# Altium PCB PowerDistributionBoard.PcbDoc
Units mil, origin at the board's own origin, x right, y up, seen from the top; angles counter-clockwise.
Board outline 5250 x 3800 mil, 2 copper layers (Top Layer, Bottom Layer); 39 components, 17 nets, 136 pads, 4 vias.
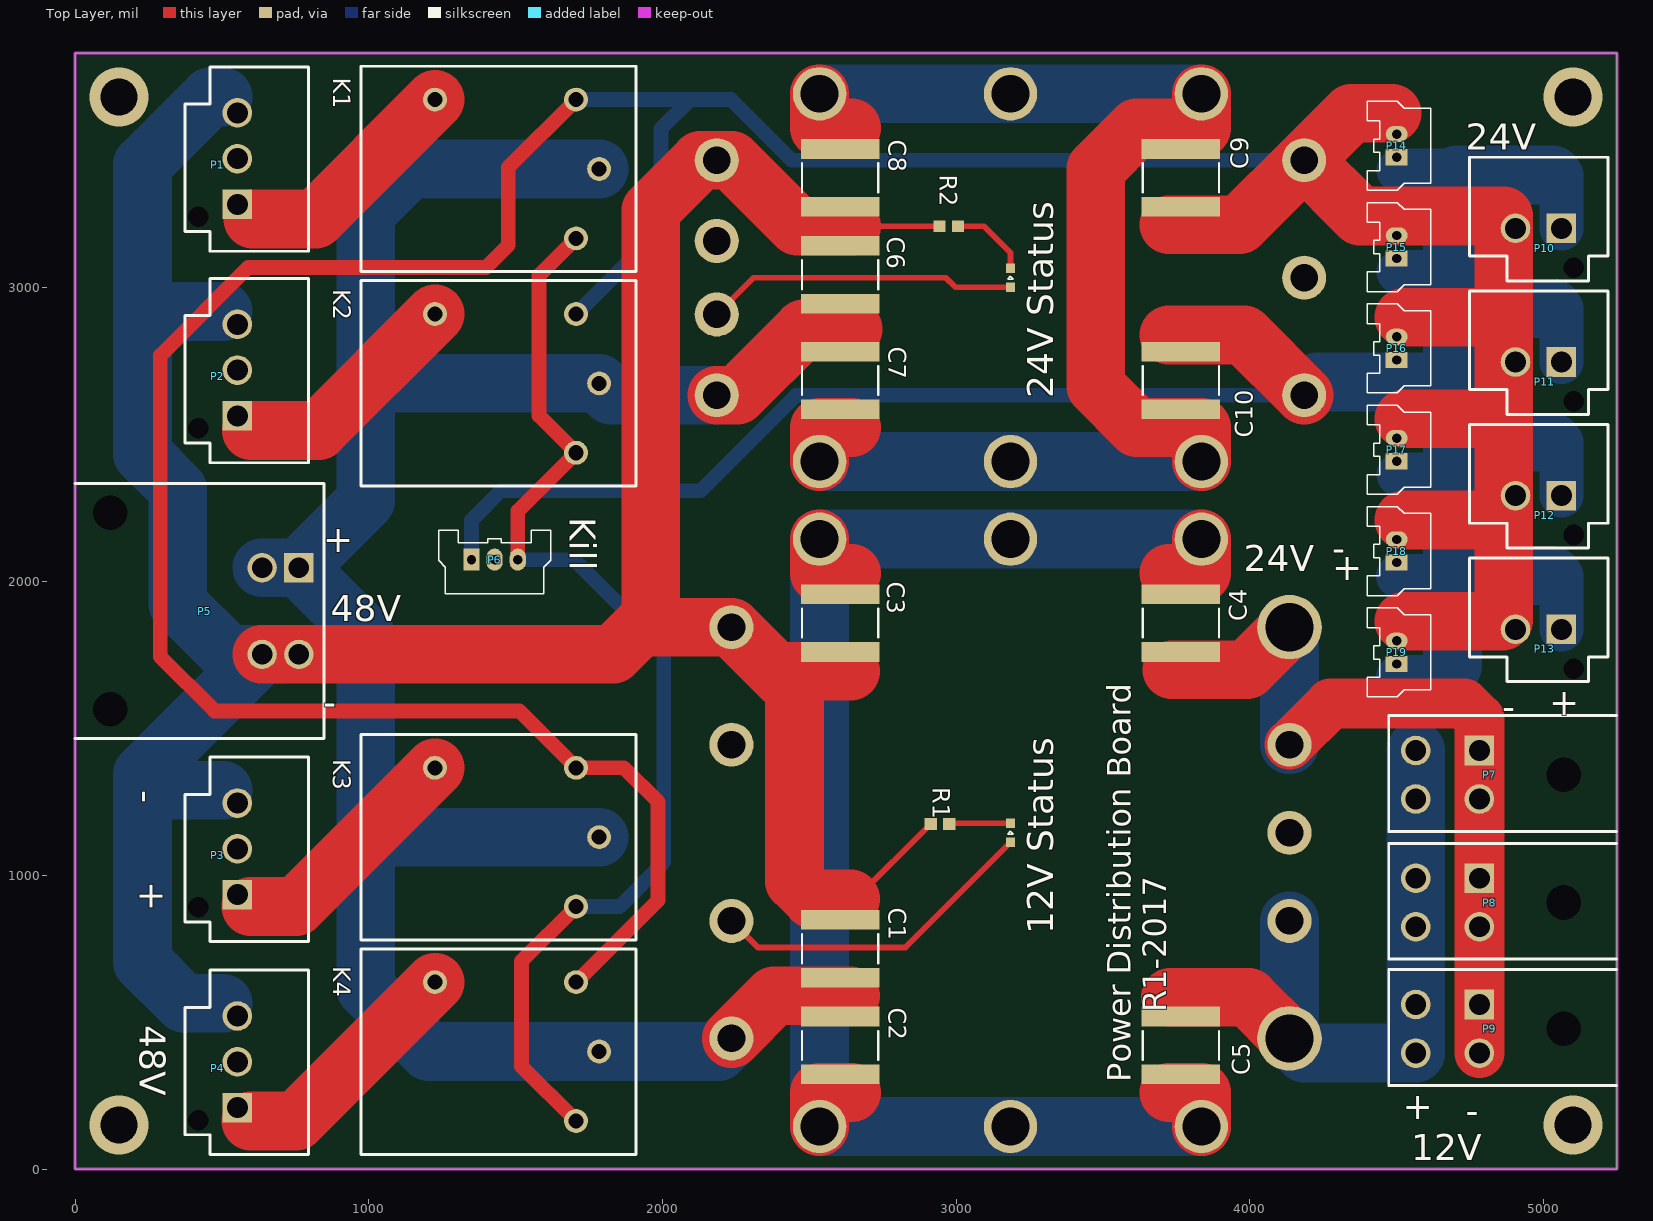
[diagram p0: Top Layer view]
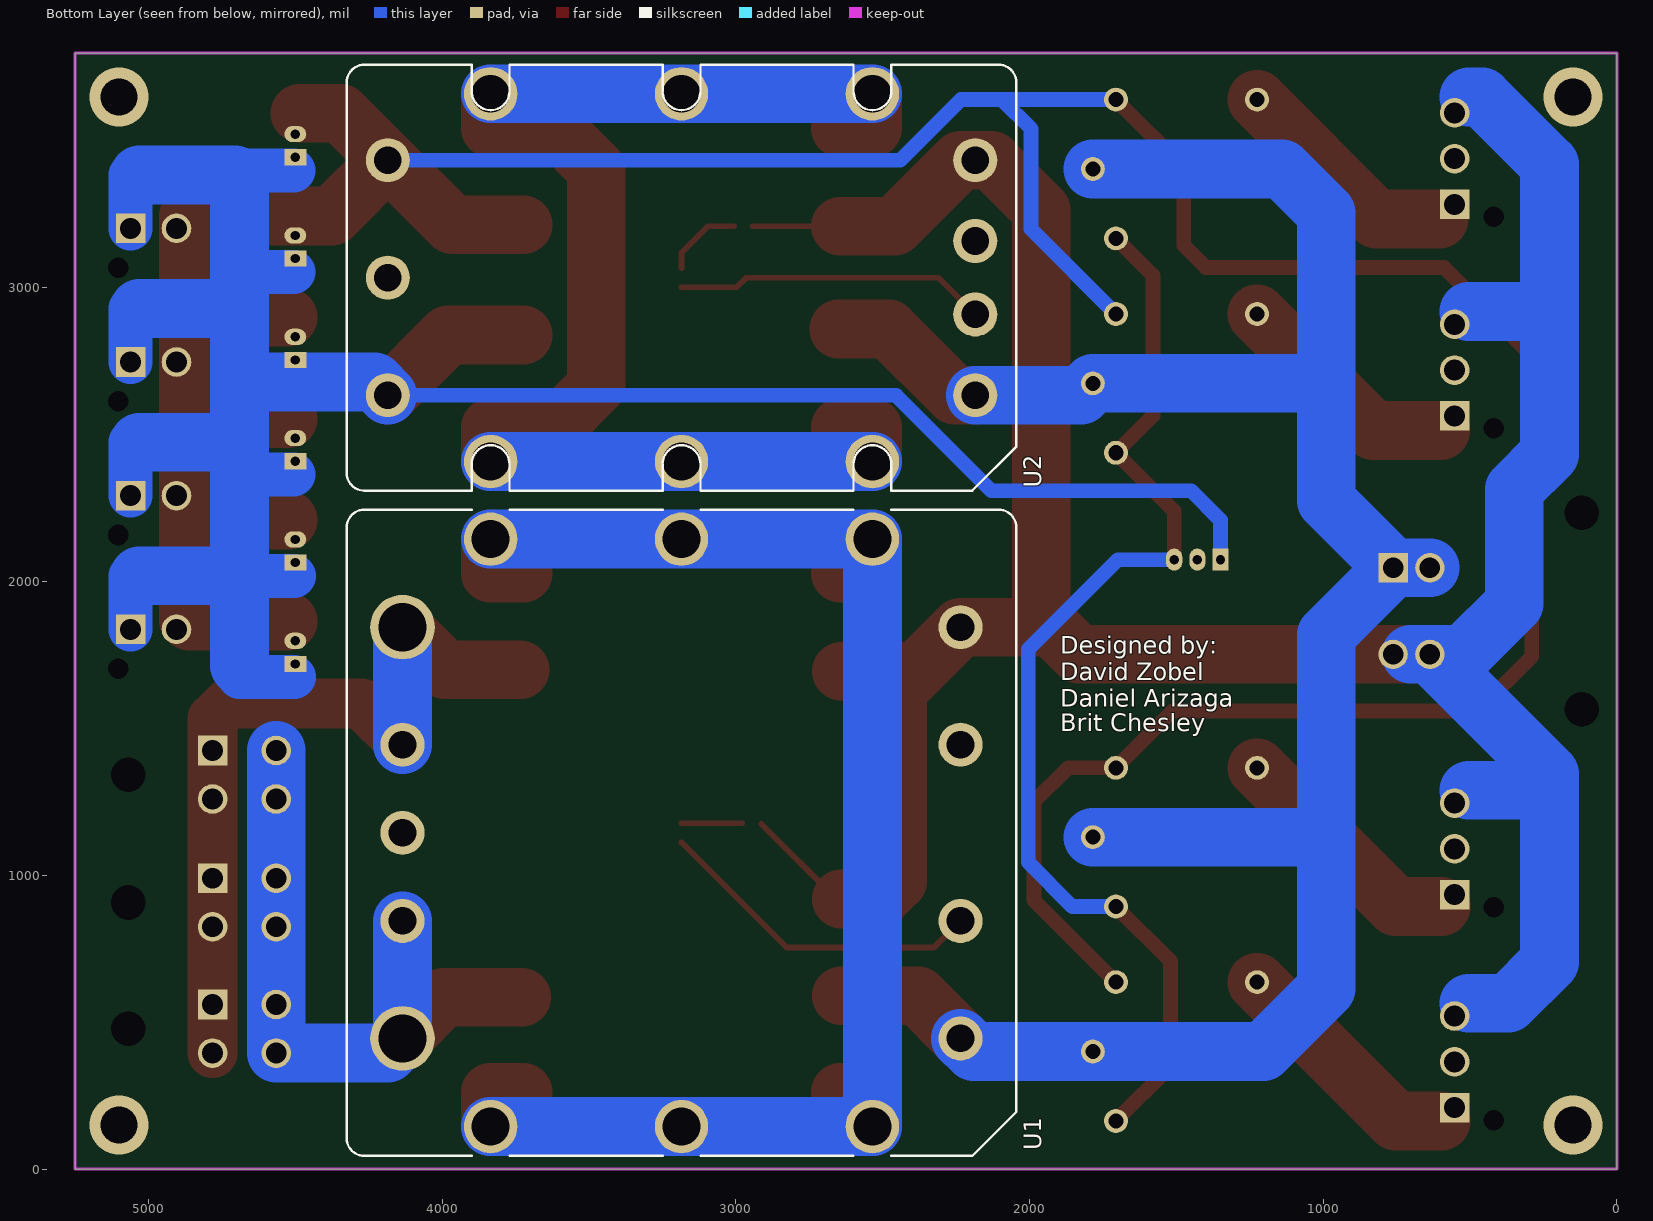
[diagram p1: Bottom Layer view, seen from below]
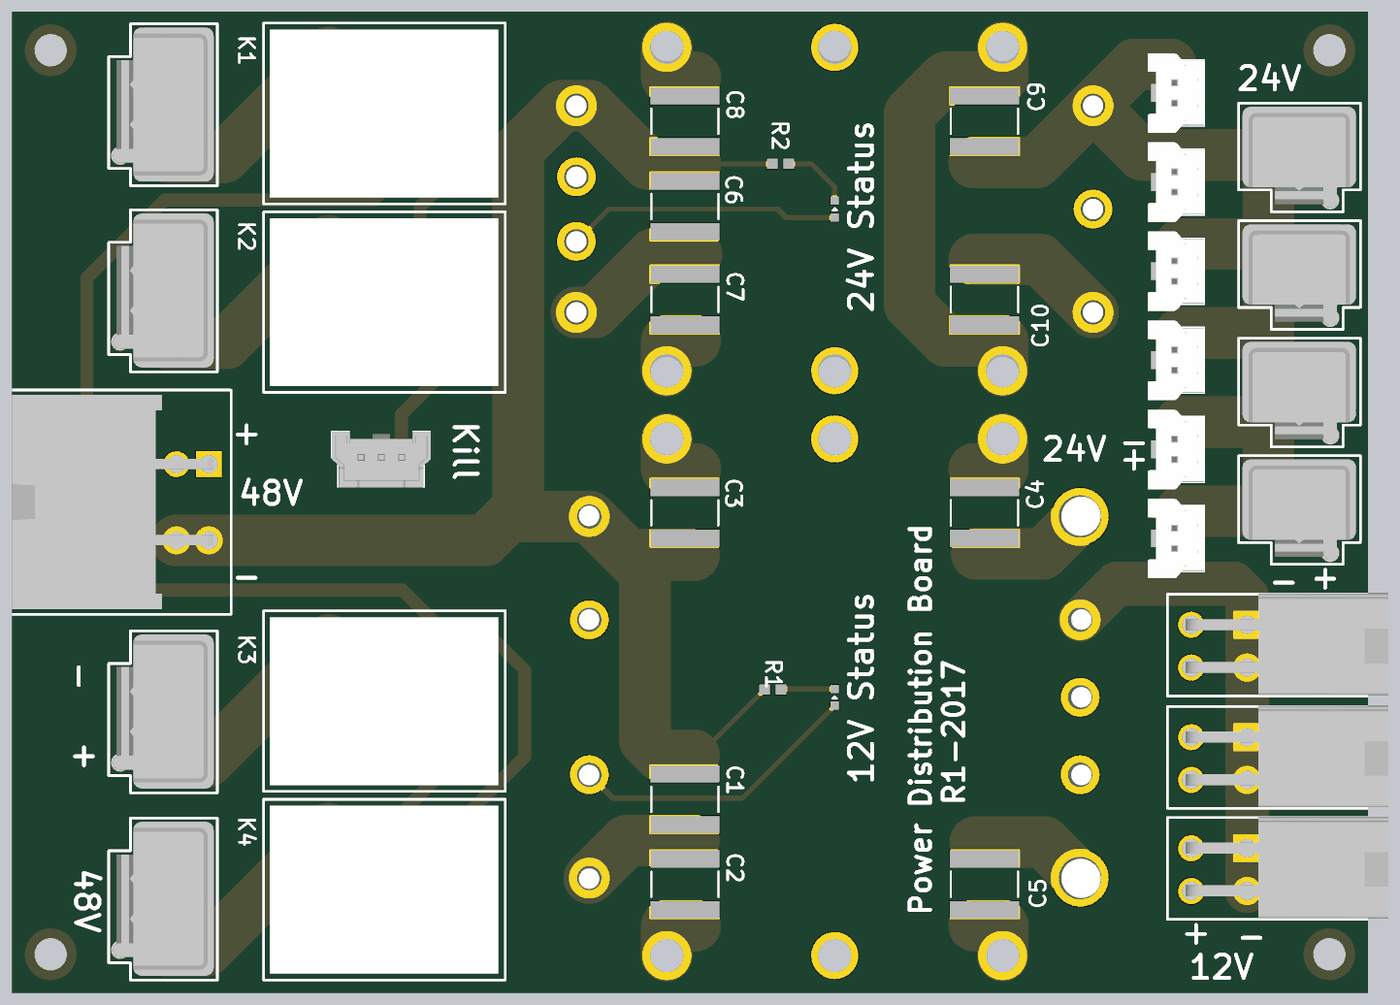
[diagram p2: 3D render of the assembled board from above, using the file's embedded part models]

## Layer stack, top to bottom
Top Solder: solder mask 0.4, Solder Resist, Dk 3.5
Top Layer: signal copper 1.4
Dielectric 1: dielectric 12.6, FR-4, Dk 4.8
Bottom Layer: signal copper 1.4
Bottom Solder: solder mask 0.4, Solder Resist, Dk 3.5

## Board outline
0,0 0,3800 5250,3800 5250,0

## Design rules (kind name [scope] priority, off if disabled: settings)
Clearance [All] p1: gap=10
PolygonConnect [All] p1: connectstyle=Relief reliefconductorwidth=10 reliefentries=4 polygonreliefangle="90 Angle" airgapwidth=10
RoutingVias [All] p1: holewidth=28 width=50 viastyle="Through Hole" minholewidth=28 minwidth=50 maxholewidth=28 maxwidth=50
SolderMaskExpansion SolderMaskExpansion_1 [IsVia] p1: expansion=-250
SolderMaskExpansion [All] p2: expansion=4
Width [All] p1: maxlimit=200 minlimit=10 preferedwidth=10
30 further rules are at their usual default settings.

## Components (designator, comment, footprint, x,y, rotation, side; value= is the part's Value field where it differs from the comment)
"12V Status" "LED" LED0603 3185,1145 r90 top
"24V Status" "LED" LED0603 3185,3035 r90 top
C1 "Cap" CAP2225 2605,750 r90 top
C2 "Cap" CAP2225 2605,421 r270 top
C3 "Cap" CAP2225 2605,1859 r90 top
C4 "Cap" CAP2225 3765,1859 r90 top
C5 "Cap" CAP2225 3765,421 r270 top
C6 "Cap" CAP2225 2605,3045 r90 top
C7 "Cap" CAP2225 2605,2685 r270 top
C8 "Cap" CAP2225 2605,3375 r90 top
C9 "Cap" CAP2225 3765,3375 r90 top
C10 "Cap" CAP2225 3765,2685 r270 top
K1 "Relay-SPST" "G5LE-1A4 DC24" 1910,3755 r180 top
K2 "Relay-SPST" "G5LE-1A4 DC24" 1910,3025 r180 top
K3 "Relay-SPST" "G5LE-1A4 DC24" 1910,1480 r180 top
K4 "Relay-SPST" "G5LE-1A4 DC24" 1910,750 r180 top
P1 "TE-AMP-CONN-3POS" "TE AMP CONN 2POS - duplicate" 795,3125 r90 top
P2 "TE-AMP-CONN-3POS" "TE AMP CONN 2POS - duplicate" 795,2405 r90 top
P3 "TE-AMP-CONN-3POS" "TE AMP CONN 2POS - duplicate" 795,775 r90 top
P4 "TE-AMP-CONN-3POS" "TE AMP CONN 2POS - duplicate" 795,50 r90 top
P5 "MOLEX SABRE 2 Pos RightAngle CONN" MOLEX-SABRE-2PIN-RA 120,2234.45 r270 top
P6 "MOLEX-HDR-1x3-SHERLOCK_VERT" MOLEX-HDR-1X3-SHERLOCK-VERT 1350,2075 r180 top
P7 "MOLEX-MINIFITJR 4Pos RightAngle CONN" MOLEX-MINIFITJR-4PINRA 4565,1260 r90 top
P8 "MOLEX-MINIFITJR 4Pos RightAngle CONN" MOLEX-MINIFITJR-4PINRA 4565,825 r90 top
P9 "MOLEX-MINIFITJR 4Pos RightAngle CONN" MOLEX-MINIFITJR-4PINRA 4565,395 r90 top
P10 "TE-AMP-CONN-2POS" "TE AMP CONN 2POS" 5220,3445 r180 top
P11 "TE-AMP-CONN-2POS" "TE AMP CONN 2POS" 5220,2990 r180 top
P12 "TE-AMP-CONN-2POS" "TE AMP CONN 2POS" 5220,2535 r180 top
P13 "TE-AMP-CONN-2POS" "TE AMP CONN 2POS" 5220,2080 r180 top
P14 "2-pin Vert Sherlock" MOLEX-HDR-1X2-SHERLOCK-VERT 4500,3445 r270 top
P15 "2-pin Vert Sherlock" MOLEX-HDR-1X2-SHERLOCK-VERT 4500,3100 r270 top
P16 "2-pin Vert Sherlock" MOLEX-HDR-1X2-SHERLOCK-VERT 4500,2755 r270 top
P17 "2-pin Vert Sherlock" MOLEX-HDR-1X2-SHERLOCK-VERT 4500,2410 r270 top
P18 "2-pin Vert Sherlock" MOLEX-HDR-1X2-SHERLOCK-VERT 4500,2065 r270 top
P19 "2-pin Vert Sherlock" MOLEX-HDR-1X2-SHERLOCK-VERT 4500,1720 r270 top
R1 "Res" RES0603 2945,1175 r180 top
R2 "Res" RES0603 2975,3210 r180 top
U1 "V48B12C250BL" FASTRAK_MINI_ONBOARD_MOUNT 3185,1145 r0 bottom
U2 "48V->24V" FASTRAK_MICRO_ONBOARD_MOUNT 3185,3035 r0 bottom

## Footprints (in the part's own frame and the unit in brackets; to place one, negate y for a bottom-side part, rotate by r counter-clockwise, add the part's x,y. Pads: shape width x height; smd on the part's side, far side on the other; paste and mask are expansions set on the pad)
CAP2225 [mm] "Chip Capacitor, 2-Leads, Body 5.60x6.40mm, IPC Medium Density"
  rect 1.7x6.8 smd: 1(-2.5,0) 2(2.5,0)
  silkscreen extent -1.25,-3.3 1.25,3.3, body extent -3,-3.4 3,3.4, height 1.8
FASTRAK_MICRO_ONBOARD_MOUNT [mil]
  round 182 hole 128.5: 0(-650,-626) 0(-650,626) 0(0,-626) 0(0,626) 0(650,-626) 0(650,626)
  round 150 hole 94: 1(-1000,400) 2(-1000,125) 3(-1000,-125) 4(-1000,-400) 5(1000,-400) 6(1000,0) 7(1000,400)
  silkscreen extent -1140,-725 1140,725, body extent -1140,-725 1140,725, height 512
FASTRAK_MINI_ONBOARD_MOUNT [mil]
  round 182 hole 128.5: 0(-650,-1000) 0(-650,1000) 0(0,-1000) 0(0,1000) 0(650,-1000) 0(650,1000)
  round 150 hole 94: 1(-950,700) 2(-950,300) 3(-950,-300) 4(-950,-700) 6(950,-300) 7(950,0) 8(950,300)
  round 220 hole 164: 5(950,-700) 9(950,700)
  silkscreen extent -1140,-1100 1140,1100, body extent -1141,-1103 1145,1103, height 512
"G5LE-1A4 DC24" [mm] "RELAY GEN PURPOSE SPST 10A 24V"
  round 2.062 hole 1.3: 1(3.185,8.885) 2(5.185,14.885) 3(17.385,2.885) 5(5.185,2.885)
  silkscreen extent 0,0 23.77,17.77, body extent 0.69,0.64 23.19,17.15, height 19
LED0603 [mm] "Chip LED, 2-Leads, Body 1.60x0.80mm, IPC Medium Density"
  rect 0.8x0.8 smd: A(-0.825,0) C(0.825,0)
  silkscreen extent -0.13,-0.25 0.12,0.25, body extent -0.88,-0.48 0.87,0.47, height 0.8
MOLEX-HDR-1X2-SHERLOCK-VERT [mm]
  rect 1.397x1.905 hole 0.8: 1(0,0)
  oval 1.397x1.905 hole 0.8: 2(-2,0)
  silkscreen extent -4.85,-2.55 2.85,2.95, body extent -4.87,-2.59 2.83,2.96, height 8.5
MOLEX-HDR-1X3-SHERLOCK-VERT [mm]
  rect 1.397x1.905 hole 0.8: 1(0,0)
  oval 1.397x1.905 hole 0.8: 2(-2,0) 3(-4,0)
  silkscreen extent -6.85,-2.55 2.85,2.95, body extent -6.88,-2.57 2.82,2.98, height 8.57
MOLEX-MINIFITJR-4PINRA [mm] "4 position, right angle, connector"
  rect 2.562x2.562 hole 1.8: 1(4.2,-5.5)
  round 2.562 hole 1.8: 2(0,-5.5) 3(4.2,0) 4(0,0)
  round 0 hole 3: ""(2.1,-12.8)
  silkscreen extent -2.8,-17.35 7.21,2.34, body extent -2.68,-19.39 7.32,0.54, height 11.4
MOLEX-SABRE-2PIN-RA [mm] "2 position, right angle, connector"
  rect 2.542x2.542 hole 1.78: 1(4.75,16.31)
  round 2.542 hole 1.78: 1(4.75,13.13) 2(12.24,13.13) 2(12.24,16.31)
  round 0 hole 3: ""(0,0) ""(16.99,0)
  silkscreen extent -2.54,-3.05 19.51,18.49, body extent -2.06,-3.04 19.02,16.75, height 13.37
RES0603 [mm] "Chip Resistor, 2-Leads, Body 1.60x0.80mm, IPC Medium Density"
  rect 1.05x1 smd: 1(-0.8,0) 2(0.8,0)
  body extent -0.88,-0.48 0.87,0.47, height 0.8
"TE AMP CONN 2POS" [mm] "CONN HEADER 2POS STR .156 TIN"
  round 0 hole 1.78: 0(2.97,9.55)
  rect 2.562x2.562 hole 1.81: 1(4.05,6.15)
  round 2.562 hole 1.81: 2(8.01,6.15)
  silkscreen extent 0,0 11.98,10.68, body extent 0.43,0.36 11.6,10.25, height 12
"TE AMP CONN 2POS - duplicate" [mm] "CONN HEADER 3POS STR .156 TIN"
  rect 2.562x2.562 hole 1.81: 1(4.05,6.15)
  round 2.562 hole 1.81: 2(8.01,6.15) 3(11.97,6.15)
  round 0 hole 1.78: ""(2.97,9.55)
  silkscreen extent 0,0 15.94,10.68, body extent 0.43,0.36 15.56,10.25, height 12

## Part data
K1 K2 K3 K4: "General Purpose Relay SPST-NO (1 Form A) 24VDC Coil Through Hole"
P1 P2 P3 P4: "3 Positions Header Connector 0.156\" (3.96mm) Through Hole Tin"
P6: "Header, Molex, 2mm Pitch Sherlock Header, Single Row, Vertical, 3 Circuits, Length 3.3mm, 0353620376"
P10 P11 P12 P13: "2 Positions Header Connector 0.156\" (3.96mm) Through Hole Tin"
P14 P15 P16 P17 P18 P19: library part MOLEX-HDR-1x2-SHERLOCK_VERT, "Header, Molex, 2mm Pitch Sherlock Header, Single Row, Vertical, 2 Circuits, Length 3.3mm, 0353620250"
U1: "CONVERTER MOD DC/DC 12V 250W"
U2: library part V48C24C150BL, "CONVERTER MOD DC/DC 24V 150W"

## Via types
v1: diameter 200, hole 125, Top Layer to Bottom Layer, 4 vias

## Nets (pads, with @x,y where several pads share a name; then routed paths per layer and width w, separated by ;. In a path a pad name is that pad's centre, name@x,y a point inside that pad or via, vN(x,y) a via of type N, cw(c..) or ccw(c..) an arc to the next point about the centre after c; other vN are vias at no path point)
12V: C5.1 P7.3 P7.4 P8.3 P8.4 P9.3 P9.4 U1.8 U1.9 | length 2344.1
  Top Layer w200: 3730,585 3995,585 U1.9
  Bottom Layer w200: U1.8 U1.9 4185,395 P9.4 P9.3 P8.4 P8.3 P7.4 P7.3
24V: C10.1 P6.1 P10.1 P11.1 P12.1 P13.1 P14.1 P15.1 P16.1 P17.1 P18.1 P19.1 U2.7 | length 8872.5
  Top Layer w200: 3725,2840 3980,2840 U2.7
  Bottom Layer w50: P6.1 1350,2210 1450,2310 2130,2310 2455,2635 U2.7
  Bottom Layer w150: 4505,1675 4690,1675 ; 4505,2020 4690,2020 ; 4506.24,2365 4665,2365 ; 4506.24,3055 4665,3055 ; 4506.24,3400 4665,3400 ; 4690,1685 4705,1700 ; P13.1 5060.55,2020 ; P12.1 5060.55,2475 ; 5060.55,2834.45 P11.1 5060.55,2930 ; P10.1 5060.55,3385
  Bottom Layer w200: U2.7 4230,2680 4665,2680 4690,2705 ; 4690,1715 4690,2020 4690,2705 ; 4690,3380 4690,2705 ; 4705,2020 5030,2020 ; 4705,2475 5030,2475 ; 4705,2930 5030,2930 ; 4705,3385 5030,3385
48V: C1.1 C2.1 C6.1 C7.1 K1.1 K2.1 K3.1 K4.1 P5.1 U1.1 U2.1 | length 8172.8
  Top Layer w200: U2.1 2255,2635 2480,2860 2650,2860 ; U1.1 2380,590 2640,590
  Bottom Layer w200: P5.1@636.93,2047.44 P5.1@762.13,2047.44 ; 995.2,1130.2 K3.1 ; 1004.8,2675.2 K2.1 1824.8,2635 U2.1 ; K1.1 1140.2,3405.2 990,3255 990,2275.32 P5.1@762.13,2047.44 ; U1.1 2190.2,400.2 K4.1 1204.8,400.2 990,615 990,1819.57 P5.1@762.13,2047.44
GND12V: C4.1 P7.1 P7.2 P8.1 P8.2 P9.1 P9.2 U1.5 U1.6 | length 2724.4
  Top Layer w170: U1.6 4275,1585 4730,1585 4781.54,1533.46 P7.1 P7.2 P8.1 P8.2 P9.1 P9.2
  Top Layer w200: 3735,1700 3990,1700 U1.5
  Bottom Layer w200: U1.6 U1.5
GND24V: C9.1 K1.5 K2.5 K3.5 K4.5 P10.2 P11.2 P12.2 P13.2 P14.2 P15.2 P16.2 P17.2 P18.2 P19.2 U2.5 | length 13390.6
  Top Layer w50: K4.5 1985,915.55 1985,1250 1868.58,1366.42 K3.5 1512.28,1560 475,1560 290,1745 290,2770 590,3070 1400,3070 1475,3145 1475,3410.55 K1.5
  Top Layer w200: 3725,3215 3965,3215 U2.5 ; 4485,3595 4345,3595 U2.5 ; 4525,1865 4860,1865 4864.65,1869.65 4864.65,2940 ; 4525,2210 4824.65,2210 ; 4525,2555 4824.65,2555 ; 4525,2900 4824.65,2900 4864.65,2940 ; U2.5 4375,3245 4864.65,3245 4864.65,2940
  Bottom Layer w50: K2.5 1995,3200.55 1995,3541.42 2095,3641.42 ; K1.5 2095,3641.42 ; U2.5 2440,3435 2233.58,3641.42 2095,3641.42
GND48V: C1.2 C3.1 C6.2 C8.1 P1.3 P2.3 P3.3 P4.3 P5.2 R1.2 R2.2 U1.4 U2.4 | length 10391
  Top Layer w20: 2645,3210 R2.2 ; 2658.5,920 R1.2
  Top Layer w200: P5.2@636.93,1752.56 762.13,1752.56 1832.56,1752.56 1925,1845 ; 2640,920 2510,920 2450,980 2450,1630 2385,1695 ; 2640,1695 2385,1695 ; 2645,3210 2460,3210 2235,3435 U2.4 2130,3435 1960,3265 1960,1845 U1.4 2385,1695
  Bottom Layer w200: 505,565 370,565 230,705 230,1290 ; 505,1290 230,1290 ; 505,2920 230,2920 ; 505,3650 460,3650 230,3420 230,2920 ; 702.44,1752.56 P5.2@636.93,1752.56 ; 230,1290 230,1345.63 P5.2@636.93,1752.56 ; 230,2920 230,2435 350,2315 350,1925 522.44,1752.56 P5.2@636.93,1752.56
"Net12V Status_A": "12V Status.A" U1.2 | length 1135.4
  Top Layer w20: U1.2 2325,755 2827.48,755 3185,1112.52
"Net12V Status_C": "12V Status.C" R1.1 | length 206
  Top Layer w20: R1.1@2978.98,1177.48 3185,1177.48
"Net24V Status_A": "24V Status.A" U2.2 | length 1065.2
  Top Layer w20: U2.2 2310,3035 2965,3035 2997.48,3002.52 3185,3002.52
"Net24V Status_C": "24V Status.C" R2.1 | length 268.3
  Top Layer w20: R2.1 3095,3210 3185,3120 3185,3067.48
NetC2_2: C2.2 C3.2 C4.2 C5.2 U1.0 | length 5504
  Top Layer w200: U1.0@2535,145 2535,261 2645,261 ; U1.0@2535,2145 2535,2029 2645,2029 ; 3725,261 3835,261 U1.0@3835,145 ; 3725,2029 3835,2029 U1.0@3835,2145
  Bottom Layer w200: U1.0@3835,145 2535,145 2535,2145 U1.0@3835,2145
NetC7_2: C7.2 C8.2 C9.2 C10.2 U2.0 | length 4860
  Top Layer w200: U2.0@2535,2409 2535,2525 2645,2525 ; U2.0@2535,3661 2535,3545 2645,3545 ; U2.0@3835,2409 3835,2525 3615,2525 3475,2665 3475,3405 3615,3545 3835,3545 U2.0@3835,3661
  Bottom Layer w200: U2.0@2535,2409 3185,2409 U2.0@3835,2409 ; U2.0@2535,3661 3185,3661 U2.0@3835,3661
NetK1_2: K1.2 K2.2 K3.2 K4.2 P6.3 | length 3874.9
  Top Layer w50: P6.3 1507.48,2240.59 K2.2 1580,2564.84 1580,3043.11 K1.2 ; K4.2 1520,349.84 1520,708.11 K3.2
  Bottom Layer w50: P6.3 1700,2075 2005,1770 2005,1045 1853.98,893.98 K3.2
NetK1_3: K1.3 P1.1 | length 788.9
  Top Layer w200: 605,3235 819.13,3235 K1.3
NetK2_3: K2.3 P2.1 | length 789.4
  Top Layer w200: P2.1@600,2515 830,2515 ; 830,2515.87 K2.3
NetK3_3: K3.3 P3.1 | length 823.2
  Top Layer w200: P3.1@598.03,893.98 753.11,893.98 K3.3
NetK4_3: K4.3 P4.1 | length 823.2
  Top Layer w200: P4.1@598.03,163.98 753.11,163.98 K4.3
pads on no net: P1. P1.2 P2. P2.2 P3. P3.2 P4. P4.2 P5. P6.2 P7. P8. P9. P10.0 P11.0 P12.0 P13.0 U1.3 U1.7 U2.3 U2.6
copper on no net:
  other v1: 150,150 5100,150 150,3650 5100,3650

## Keep-outs
Keep-Out Layer:
  the board outline again, w10

## Silkscreen, mask and mechanical layers (free items; w line width, h text height)
Top Overlay:
  text "24V" at 4735,3470 h90
  text "Kill" at 1685,2220 h90 r270
  text "+" at 845,2100 h90
  text "-" at 4280,2070 h90
  text "24V" at 3980,2035 h90
  text "+" at 4280,2005 h90
  text "48V" at 870,1865 h90
  text "-" at 845,1545 h90
  text "+" at 5020,1545 h90
  text "-" at 4860,1530 h90
  text "-" at 200,1290 h90 r270
  text "+" at 220,980 h90 r270
  text "48V" at 220,490 h90 r270
  text "Power Distribution Board /        R1-2017" at 3715,295 h80 r90
  text "+" at 4520,170 h90
  text "-" at 4735,155 h90
  text "12V" at 4550,30 h90
Bottom Overlay:
  text "Designed by:" at 1895,1755 h60
  text "David Zobel" at 1895,1665 h60
  text "Daniel Arizaga" at 1895,1575 h60
  text "Brit Chesley" at 1895,1490 h60

## Dimensions
0,0 to 0,3800 on Mechanical 15
0,0 to 150,3650 on Mechanical 15
0,0 to 150,150 on Mechanical 15
0,0 to 5250,0 on Mechanical 15
0,0 to 5100,150 on Mechanical 15
0,0 to 150,150 on Mechanical 15